# Altium PCB LP_LED_CUBE_8x8x8.PcbDoc (part 2 of 2)
Units mil, origin at the board's own origin, x right, y up, seen from the top; angles counter-clockwise.
Board outline 5225 x 2860 mil, 2 copper layers (Top Layer, Bottom Layer); 188 components, 245 nets, 933 pads, 0 vias.
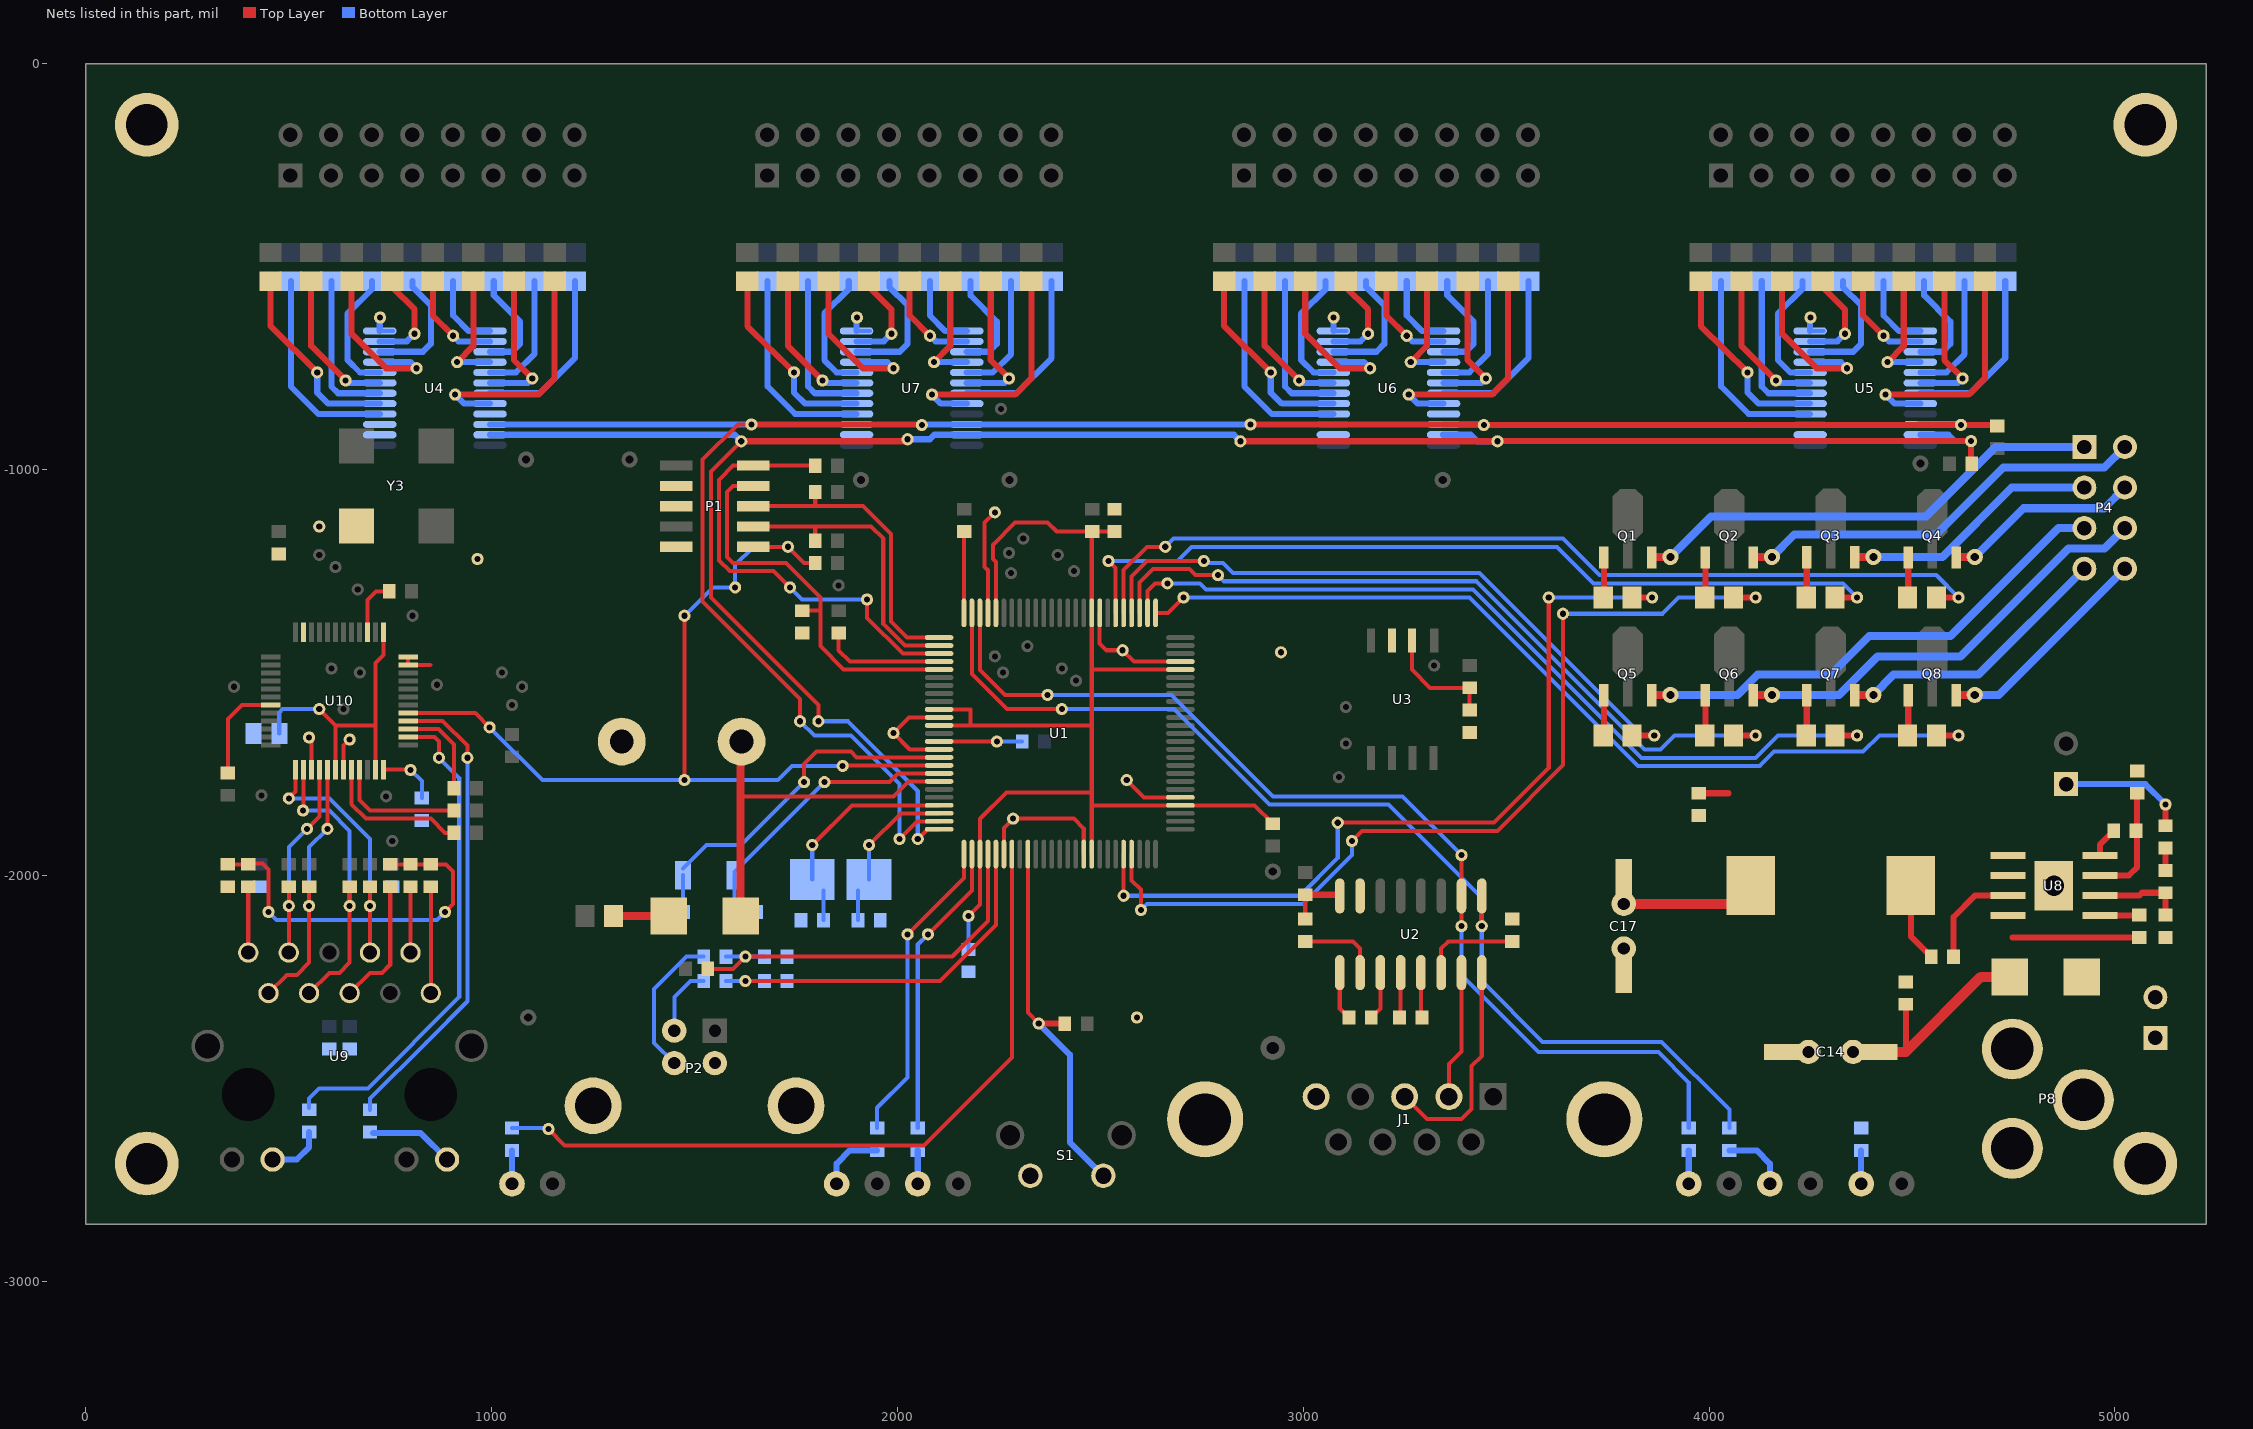
[diagram p2: the nets of this part, all layers, seen from the top]

## Nets (pads, with @x,y where several pads share a name; then routed paths per layer and width w, separated by ;. In a path a pad name is that pad's centre, name@x,y a point inside that pad or via, vN(x,y) a via of type N, cw(c..) or ccw(c..) an arc to the next point about the centre after c; other vN are vias at no path point) (continued)
GND: BT1.2 C4.1 C5.1 C6.1 C7.1 C8.1 C9.2 C10.1 C11.1 C12.2 C13.2 C14.2 C15.2 C17.2 C18.2 C19.2 C20.1 C21.1 C22.1 C23.1 C24.1 C25.2 C26.2 J1.5 J1.10 J1.11 P1.3 P1.5 P1.9 P2.4 P2.5 P8.2 P8.3 pad. pad.0@575,-1140 pad.1@965,-1220 pad.2@550,-1660 pad.3@2285,-1860 pad.4@2590,-2350 pad.5@2945,-1450 pad.6@2565,-1765 pad.7@1990,-1649.08 pad.8@725,-625 pad.8@1900,-625 pad.8@3075,-625 pad.8@4250,-625 pad.10@2240,-1105 pad.16@4850,-2025 pad.30 pad.41@2555,-1445 R7.2 R96.1 R98.1 R115.2 S1.1 U1.11 U1.15 U1.31 U1.41 U1.55 U1.72 U1.83 U1.97 U2.15 U3.7 U4.2 U4.3 U4.12 U4.21 U5.2 U5.12 U6.2 U6.12 U6.21 U7.2 U7.3 U7.12 U8.5 U10.15 U10.19 U10.35 U10.36 U10.47 Y3.2 | length 1807.2
  Top Layer w10: pad.2@550,-1660 556.1,-1666.1 U10.15@556.1,-1739.29 ; U10.19@634.84,-1739.29 634.84,-1680.16 pad.30@650,-1665 ; U10.35@794.29,-1481.42 U10.36@794.29,-1461.73 ; U10.35@794.28,-1481.32 848.58,-1481.42 ; U1.15@2102.76,-1689.37 2030.29,-1689.37 pad.7@1990,-1649.08 2028.45,-1610.63 U1.11@2102.76,-1610.63 ; U1.97@2222.83,-1352.76 2222.83,-1247.83 2215,-1240 2215,-1130 pad.10@2240,-1105 ; U1.31@2262.2,-1947.24 2262.2,-1882.8 pad.3@2285,-1860 2435,-1860 2459.06,-1884.06 U1.41@2459.06,-1947.24 ; U1.83@2498.43,-1352.76 2498.43,-1428.43 2515,-1445 pad.41@2555,-1445 2582.83,-1472.83 U1.72@2697.24,-1472.83 ; pad.6@2565,-1765 2607.48,-1807.48 U1.55@2697.24,-1807.48
  Bottom Layer w10: U4.12@724.17,-658.27 U4.12@756.73,-658.27 ; pad.8@724.17,-625.83 pad.8@725,-625 ; U7.12@1899.17,-658.27 U7.12@1931.73,-658.27 ; pad.8@1899.17,-625.83 pad.8@1900,-625 ; U6.12@3074.17,-658.27 U6.12@3106.73,-658.27 ; pad.8@3074.17,-625.83 pad.8@3075,-625 ; U5.12@4249.17,-658.27 U5.12@4281.73,-658.27 ; pad.8@4249.17,-625.83 pad.8@4250,-625
  Bottom Layer w15: U4.12@724.17,-658.27 pad.8@724.17,-625.83 ; U7.12@1899.17,-658.27 pad.8@1899.17,-625.83 ; U6.12@3074.17,-658.27 pad.8@3074.17,-625.83 ; U5.12@4249.17,-658.27 pad.8@4249.17,-625.83
LED1: pad.29@2075,-2145 R13.1 U1.27 | length 730.5
  Top Layer w10: pad.29@2075,-2145 2183.46,-2036.54 U1.27@2183.46,-1947.24
  Bottom Layer w10: R13.1@2050,-2622.44 2050,-2170 pad.29@2075,-2145
LED2: pad.28@2025,-2145 R14.1 U1.26 | length 763.7
  Top Layer w10: pad.28@2025,-2145 2163.78,-2006.22 U1.26@2163.78,-1947.24
  Bottom Layer w10: R14.1@1950,-2622.44 1950,-2572.44 2025,-2497.44 pad.28@2025,-2145
LED_ACT: pad.25@870,-1710 R105.2 U10.26 | length 1227.1
  Top Layer w10: U10.26@794.29,-1658.58 858.58,-1658.58 870,-1670 pad.25@870,-1710
  Bottom Layer w10: R105.2@550,-2572.44 550,-2550 575,-2525 695,-2525 920,-2300 920,-1760 pad.25@870,-1710
LED_LINK: pad.26 R106.2 U10.28 | length 1167.7
  Top Layer w10: U10.28@794.29,-1619.21 879.21,-1619.21 940,-1680 pad.26@940,-1710
  Bottom Layer w10: R106.2@700,-2577.44 700,-2550 840,-2410 940,-2310 pad.26@940,-1710
"M232 +V": C2.1 U2.2 | length 201.7
  Top Layer w10: C2.1@3005,-2162.56 3122.56,-2162.56 3140,-2180 U2.2@3140,-2239.49
"M232 RX2": J1.3 U2.8 | length 544
  Top Layer w10: J1.3@3250,-2545.08 3304.92,-2600 3390,-2600 3415,-2575 3415,-2470 3440,-2445 U2.8@3440,-2239.49
"M232 TX2": J1.2 U2.7 | length 318.4
  Top Layer w10: J1.2@3359.06,-2545.08 3359.06,-2465 3390,-2434.06 U2.7@3390,-2239.49
NetBT1_1: BT1.1 D6.2 U1.19 | length 934.5
  Top Layer w10: 1613.58,-1805 1990,-1805 2026.89,-1768.11 U1.19@2102.76,-1768.11
  Top Layer w20: D6.2@1613.58,-2100 1613.58,-1805 BT1.1@1613.58,-1670
NetC1_1: C1.1 U2.3 | length 119.8
  Top Layer w10: C1.1@3167.56,-2350 3190,-2327.56 U2.3@3190,-2239.49
NetC1_2: C1.2 U2.1 | length 119.8
  Top Layer w10: U2.1@3090,-2239.49 3090,-2327.56 C1.2@3112.44,-2350
NetC2_2: C2.2 L1.1 U2.16 | length 141.9
  Top Layer w10: C2.2@3005,-2107.44 L1.1@3005,-2047.56
  Top Layer w15: L1.1@3005,-2047.56 U2.16@3087.05,-2047.56
NetC3_1: C3.1 U2.5 | length 108
  Top Layer w10: C3.1@3290,-2347.44 U2.5@3290,-2239.49
NetC3_2: C3.2 U2.4 | length 108
  Top Layer w10: C3.2@3240,-2347.44 U2.4@3240,-2239.49
NetC4_2: C4.2 U2.6 | length 241.7
  Top Layer w10: U2.6@3340,-2239.49 3340,-2180 3357.44,-2162.56 C4.2@3515,-2162.56
NetC5_2: C5.2 pad.88 U1.16 Y1.1 | length 871.4
  Top Layer w10: pad.88@1770,-1770 1770,-1725 1800,-1695 1885,-1695 1899.06,-1709.06 U1.16@2102.76,-1709.06
  Bottom Layer w10: Y1.1@1471.46,-1982.44 1529.45,-1924.45 ; C5.2@1472.01,-2089.45 Y1.1@1472.01,-1999.21 ; 1530.55,-1924.45 1614.45,-1924.45 pad.88@1769.45,-1769.45
NetC6_2: C6.2 pad.89 U1.18 Y1.2 | length 695.9
  Top Layer w10: pad.89@1820,-1770 1980,-1770 2001.57,-1748.43 U1.18@2102.76,-1748.43
  Bottom Layer w10: C6.2@1597.99,-2089.45 Y1.2@1597.99,-1999.21 ; Y1.2@1598.54,-1991.46 pad.89@1820.55,-1769.45
NetC7_2: C7.2 pad.84@1790,-1925 U1.22 Y2.1 | length 510.7
  Top Layer w10: pad.84@1790,-1925 1887.83,-1827.17 U1.22@2102.76,-1827.17
  Bottom Layer w10: Y2.1@1790,-2010 pad.84@1790,-1925 ; C7.2@1817.56,-2110 Y2.1@1817.56,-2037.56
NetC8_2: C8.2 pad.84@1930,-1925 U1.23 Y2.2 | length 362.6
  Top Layer w10: pad.84@1930,-1925 2008.15,-1846.85 U1.23@2102.76,-1846.85
  Bottom Layer w10: C8.2@1902.44,-2110 Y2.2@1902.44,-2037.56 ; Y2.2@1930,-2010 pad.84@1930,-1925
NetC9_1: C9.1 C10.2 L2.2 L3.2 pad.73 U1.10 U1.12 U1.28 U1.42 U1.54 U1.71 U1.84 U1.96 | length 3108.7
  Top Layer w10: U1.12@2102.76,-1630.32 2180,-1630.32 ; U1.10@2102.76,-1590.94 2180,-1590.94 2180,-1630.32 ; pad.73@2175,-2100 2203.15,-2071.85 U1.28@2203.15,-1947.24 2203.15,-1860.22 2268.37,-1795 2478.74,-1795 ; U1.96@2242.52,-1352.76 2242.52,-1227.52 2235,-1220 2235,-1185 2290,-1130 2370,-1130 2392.56,-1152.56 L3.2@2480,-1152.56 C10.2@2535,-1152.56 ; 2478.43,-1630.32 2180,-1630.32 ; U1.42@2478.74,-1947.24 2478.74,-1492.52 ; 2478.74,-1827.17 U1.54@2697.24,-1827.17 2879.72,-1827.17 L2.2@2925,-1872.44 ; L3.2@2478.74,-1153.82 U1.84@2478.74,-1352.76 2478.74,-1492.52 ; U1.71@2697.24,-1492.52 2478.74,-1492.52
  Bottom Layer w10: C9.1@2175,-2182.44 pad.73@2175,-2100
NetC11_2: C11.2 L4.1 U3.6 | length 287.2
  Top Layer w10: U3.6@3267.64,-1421.3 3267.64,-1492.64 3312.56,-1537.56 L4.1@3410,-1537.56 C11.2@3410,-1592.44
NetC16_1: C16.1 U8.7 | length 253.7
  Top Layer w15: C16.1@4602.56,-2200 4602.56,-2102.44 4655.39,-2049.61 U8.7@4736.81,-2049.61
NetC16_2: C16.2 L5.1 U8.6 | length 195.7
  Top Layer w15: L5.1@4497.5,-2025 4497.5,-2150.06 C16.2@4547.44,-2200
NetC19_1: C19.1 R97.2 U8.3 | length 282.1
  Top Layer w15: U8.3@4963.58,-2000 5035,-2000 5055,-1980 C19.1@5055,-1797.56
NetC25_1: C25.1 pad.27@885,-2090 pad.28@450,-2090 R99.2 R104.2 R107.1 R108.1 | length 934.4
  Top Layer w10: C25.1@350,-1972.44 R108.1@400,-1972.44 402.44,-1970 435,-1970 450,-1985 pad.28@450,-2090 ; R104.2@750,-1972.44 R99.2@800,-1972.44 R107.1@850,-1972.44 887.44,-1972.44 905,-1990 905,-2070 pad.27@885,-2090
  Bottom Layer w10: pad.28@450,-2090 470,-2110 865,-2110 pad.27@885,-2090
NetD1_2: D1.2 R12.2 | length 82.4
  Bottom Layer w15: D1.2@1050,-2760 R12.2@1050,-2677.56
NetD2_2: D2.2 R13.2 | length 82.4
  Bottom Layer w15: D2.2@2050,-2760 R13.2@2050,-2677.56
NetD3_2: D3.2 R14.2 | length 163.4
  Bottom Layer w15: D3.2@1850,-2760 1850,-2710 1882.44,-2677.56 R14.2@1950,-2677.56
NetD4_2: D4.2 R15.2 | length 82.4
  Bottom Layer w15: D4.2@3950,-2760 R15.2@3950,-2677.56
NetD5_2: D5.2 R16.2 | length 163.4
  Bottom Layer w15: R16.2@4050,-2677.56 4117.56,-2677.56 4150,-2710 D5.2@4150,-2760
NetD6_1: D6.1 R17.1 | length 136
  Top Layer w20: R17.1@1300.43,-2100 D6.1@1436.42,-2100
NetD7_1: D7.1 W1.2
NetD8_2: D8.2 R98.2 | length 82.4
  Bottom Layer w15: D8.2@4375,-2760 R98.2@4375,-2677.56
NetP2_2: P2.2 R20.2 | length 171.5
  Bottom Layer w10: P2.2@1450,-2382.5 1450,-2300 1490,-2260 R20.2@1522.44,-2260
NetP2_3: P2.3 R19.2 | length 358.8
  Bottom Layer w10: P2.3@1450,-2462.5 1400,-2412.5 1400,-2280 1480,-2200 R19.2@1522.44,-2200
NetP8_1: P8.1 W1.1
NetQ1_2: Q1.2 R21.1 | length 97.3
  Top Layer w15: R21.1@3740.94,-1313.62 Q1.2@3740.94,-1216.3
NetQ2_2: Q2.2 R29.1 | length 97.3
  Top Layer w15: R29.1@3990.94,-1313.62 Q2.2@3990.94,-1216.3
NetQ3_2: Q3.2 R39.1 | length 97.3
  Top Layer w15: R39.1@4240.94,-1313.19 Q3.2@4240.94,-1215.87
NetQ4_2: Q4.2 R40.1 | length 97.3
  Top Layer w15: R40.1@4490.94,-1313.62 Q4.2@4490.94,-1216.3
NetQ5_2: Q5.2 R41.1 | length 97.3
  Top Layer w15: R41.1@3740.94,-1653.62 Q5.2@3740.94,-1556.3
NetQ6_2: Q6.2 R42.1 | length 97.3
  Top Layer w15: R42.1@3990.94,-1653.62 Q6.2@3990.94,-1556.3
NetQ7_2: Q7.2 R43.1 | length 97.3
  Top Layer w15: R43.1@4240.94,-1653.62 Q7.2@4240.94,-1556.3
NetQ8_2: Q8.2 R47.1 | length 97.3
  Top Layer w15: R47.1@4490.94,-1653.62 Q8.2@4490.94,-1556.3
NetR11_2: pad.70 R11.2 S1.2 U1.34 | length 934.2
  Top Layer w10: U1.34@2321.26,-1947.24 2321.26,-2338.13 pad.70@2348.13,-2365
  Top Layer w15: pad.70@2348.13,-2365 R11.2@2412.44,-2365
  Bottom Layer w15: pad.70@2348.13,-2365 2425,-2441.87 2425,-2657.5 S1.2@2507.5,-2740
NetR22_2: R22.2 U4.4 | length 506.8
  Bottom Layer w15: R22.2@505,-535.43 505,-795 572.8,-862.8 U4.4@724.17,-862.8
NetR23_2: pad.5@570,-760 R23.2 U4.5 | length 488
  Top Layer w15: R23.2@455,-535.43 455,-646.35 pad.5@570,-760
  Bottom Layer w15: pad.5@570,-760 570,-810 597.2,-837.2 U4.5@724.17,-837.2
NetR24_1: pad.12@910,-815 R24.1 U4.20 | length 596.2
  Top Layer w15: pad.12@910,-815 1115,-815 1155,-775 R24.1@1155,-535.43
  Bottom Layer w15: pad.12@910,-815 932.2,-837.2 U4.20@995.83,-837.2
NetR25_2: R25.2 U4.6 | length 385.6
  Bottom Layer w15: R25.2@605,-535.43 605,-795 621.61,-811.61 U4.6@724.17,-811.61
NetR26_1: R26.1 U4.19 | length 434.6
  Bottom Layer w15: U4.19@995.83,-811.61 1118.39,-811.61 1205,-725 R26.1@1205,-535.43
NetR27_2: pad.6@640,-780 R27.2 U4.7 | length 366.4
  Top Layer w15: R27.2@555,-535.43 555,-695 pad.6@640,-780
  Bottom Layer w10: pad.6@640,-780 pad.6@646.02,-786.02
  Bottom Layer w15: pad.6@646.02,-786.02 U4.7@724.17,-786.02
NetR28_1: pad.11@1100,-775 R28.1 U4.18 | length 366.9
  Top Layer w15: R28.1@1055,-535.43 1055,-730 pad.11@1100,-775
  Bottom Layer w15: U4.18@995.83,-786.02 1088.98,-786.02 pad.11@1100,-775
NetR30_2: R30.2 U4.8 | length 311.2
  Bottom Layer w15: R30.2@705,-535.43 705,-555 645,-615 645,-730 675.43,-760.43 U4.8@724.17,-760.43
NetR31_1: R31.1 U4.17 | length 307.6
  Bottom Layer w15: U4.17@995.83,-760.43 1059.57,-760.43 1105,-715 R31.1@1105,-535.43
NetR32_2: pad.7@815,-750 R32.2 U4.9 | length 421.8
  Top Layer w15: R32.2@655,-535.43 655,-665 740,-750 pad.7@815,-750
  Bottom Layer w15: U4.9@724.17,-735.04 800.04,-735.04 pad.7@815,-750
NetR33_1: pad.13@915,-735 R33.1 U4.16 | length 297
  Top Layer w15: pad.13@915,-735 955,-695 R33.1@955,-535.43
  Bottom Layer w10: pad.13@915,-735 pad.13@915,-735
  Bottom Layer w15: pad.13@915,-735 U4.16@995.83,-735.04
NetR34_2: R34.2 U4.10 | length 307.5
  Bottom Layer w15: U4.10@724.17,-709.45 830.55,-709.45 850,-690 850,-595 805,-550 R34.2@805,-535
NetR35_1: R35.1 U4.15 | length 263.7
  Bottom Layer w15: U4.15@995.83,-709.45 1050.55,-709.45 1070,-690 1070,-635 1005,-570 R35.1@1005,-535.43
NetR36_2: pad.9@810,-665 R36.2 U4.11 | length 246
  Top Layer w10: R36.2@755,-550 R36.2@755,-535.43
  Top Layer w15: R36.2@755,-550 810,-605 pad.9@810,-665
  Bottom Layer w15: U4.11@724.17,-683.86 791.14,-683.86 pad.9@810,-665
NetR37_1: pad.10@905,-670 R37.1 U4.14 | length 251.8
  Top Layer w15: R37.1@855,-535.43 855,-620 pad.10@905,-670
  Bottom Layer w15: pad.10@905,-670 918.86,-683.86 U4.14@995.83,-683.86
NetR38_1: R38.1 U4.13 | length 191.2
  Bottom Layer w15: R38.1@905,-535.43 905,-620 943.27,-658.27 U4.13@995.83,-658.27
NetR44_2: R44.2 U5.4 | length 506.8
  Bottom Layer w15: R44.2@4030,-535.43 4030,-795 4097.8,-862.8 U5.4@4249.17,-862.8
NetR45_2: pad.5@4095,-760 R45.2 U5.5 | length 488
  Top Layer w15: R45.2@3980,-535.43 3980,-646.35 pad.5@4095,-760
  Bottom Layer w15: pad.5@4095,-760 4095,-810 4122.2,-837.2 U5.5@4249.17,-837.2
NetR46_1: pad.12@4435,-815 R46.1 U5.20 | length 596.2
  Top Layer w15: pad.12@4435,-815 4640,-815 4680,-775 R46.1@4680,-535.43
  Bottom Layer w15: pad.12@4435,-815 4457.2,-837.2 U5.20@4520.83,-837.2
NetR48_2: R48.2 U5.6 | length 385.6
  Bottom Layer w15: R48.2@4130,-535.43 4130,-795 4146.61,-811.61 U5.6@4249.17,-811.61
NetR49_1: R49.1 U5.19 | length 434.6
  Bottom Layer w15: U5.19@4520.83,-811.61 4643.39,-811.61 4730,-725 R49.1@4730,-535.43
NetR50_2: pad.6@4165,-780 R50.2 U5.7 | length 366.4
  Top Layer w15: R50.2@4080,-535.43 4080,-695 pad.6@4165,-780
  Bottom Layer w10: pad.6@4165,-780 pad.6@4171.02,-786.02
  Bottom Layer w15: pad.6@4171.02,-786.02 U5.7@4249.17,-786.02
NetR51_1: pad.11@4625,-775 R51.1 U5.18 | length 366.9
  Top Layer w15: R51.1@4580,-535.43 4580,-730 pad.11@4625,-775
  Bottom Layer w15: U5.18@4520.83,-786.02 4613.98,-786.02 pad.11@4625,-775
NetR52_2: R52.2 U6.4 | length 506.8
  Bottom Layer w15: R52.2@2855,-535.43 2855,-795 2922.8,-862.8 U6.4@3074.17,-862.8
NetR53_2: R53.2 U5.8 | length 311.2
  Bottom Layer w15: R53.2@4230,-535.43 4230,-555 4170,-615 4170,-730 4200.43,-760.43 U5.8@4249.17,-760.43
NetR54_1: R54.1 U5.17 | length 307.6
  Bottom Layer w15: U5.17@4520.83,-760.43 4584.57,-760.43 4630,-715 R54.1@4630,-535.43
NetR55_2: pad.5@2920,-760 R55.2 U6.5 | length 488
  Top Layer w15: R55.2@2805,-535.43 2805,-646.35 pad.5@2920,-760
  Bottom Layer w15: pad.5@2920,-760 2920,-810 2947.2,-837.2 U6.5@3074.17,-837.2
NetR56_1: pad.12@3260,-815 R56.1 U6.20 | length 596.2
  Top Layer w15: pad.12@3260,-815 3465,-815 3505,-775 R56.1@3505,-535.43
  Bottom Layer w15: pad.12@3260,-815 3282.2,-837.2 U6.20@3345.83,-837.2
NetR57_2: pad.7@4340,-750 R57.2 U5.9 | length 421.8
  Top Layer w15: R57.2@4180,-535.43 4180,-665 4265,-750 pad.7@4340,-750
  Bottom Layer w15: U5.9@4249.17,-735.04 4325.04,-735.04 pad.7@4340,-750
NetR58_1: pad.13@4440,-735 R58.1 U5.16 | length 297
  Top Layer w15: pad.13@4440,-735 4480,-695 R58.1@4480,-535.43
  Bottom Layer w10: pad.13@4440,-735 pad.13@4440,-735
  Bottom Layer w15: pad.13@4440,-735 U5.16@4520.83,-735.04
NetR59_2: R59.2 U6.6 | length 385.6
  Bottom Layer w15: R59.2@2955,-535.43 2955,-795 2971.61,-811.61 U6.6@3074.17,-811.61
NetR60_1: R60.1 U6.19 | length 434.6
  Bottom Layer w15: U6.19@3345.83,-811.61 3468.39,-811.61 3555,-725 R60.1@3555,-535.43
NetR61_2: R61.2 U5.10 | length 307.5
  Bottom Layer w15: U5.10@4249.17,-709.45 4355.55,-709.45 4375,-690 4375,-595 4330,-550 R61.2@4330,-535
NetR62_1: R62.1 U5.15 | length 263.7
  Bottom Layer w15: U5.15@4520.83,-709.45 4575.55,-709.45 4595,-690 4595,-635 4530,-570 R62.1@4530,-535.43
NetR63_2: pad.6@2990,-780 R63.2 U6.7 | length 366.4
  Top Layer w15: R63.2@2905,-535.43 2905,-695 pad.6@2990,-780
  Bottom Layer w10: pad.6@2990,-780 pad.6@2996.02,-786.02
  Bottom Layer w15: pad.6@2996.02,-786.02 U6.7@3074.17,-786.02
NetR64_1: pad.11@3450,-775 R64.1 U6.18 | length 366.9
  Top Layer w15: R64.1@3405,-535.43 3405,-730 pad.11@3450,-775
  Bottom Layer w15: U6.18@3345.83,-786.02 3438.98,-786.02 pad.11@3450,-775
NetR65_2: pad.9@4335,-665 R65.2 U5.11 | length 246
  Top Layer w10: R65.2@4280,-550 R65.2@4280,-535.43
  Top Layer w15: R65.2@4280,-550 4335,-605 pad.9@4335,-665
  Bottom Layer w15: U5.11@4249.17,-683.86 4316.14,-683.86 pad.9@4335,-665
NetR66_1: pad.10@4430,-670 R66.1 U5.14 | length 251.8
  Top Layer w15: R66.1@4380,-535.43 4380,-620 pad.10@4430,-670
  Bottom Layer w15: pad.10@4430,-670 4443.86,-683.86 U5.14@4520.83,-683.86
NetR67_2: R67.2 U6.8 | length 311.2
  Bottom Layer w15: R67.2@3055,-535.43 3055,-555 2995,-615 2995,-730 3025.43,-760.43 U6.8@3074.17,-760.43
NetR68_1: R68.1 U6.17 | length 307.6
  Bottom Layer w15: U6.17@3345.83,-760.43 3409.57,-760.43 3455,-715 R68.1@3455,-535.43
NetR69_1: R69.1 U5.13 | length 191.2
  Bottom Layer w15: R69.1@4430,-535.43 4430,-620 4468.27,-658.27 U5.13@4520.83,-658.27
NetR70_2: R70.2 U7.4 | length 506.8
  Bottom Layer w15: R70.2@1680,-535.43 1680,-795 1747.8,-862.8 U7.4@1899.17,-862.8
NetR71_2: pad.7@3165,-750 R71.2 U6.9 | length 421.8
  Top Layer w15: R71.2@3005,-535.43 3005,-665 3090,-750 pad.7@3165,-750
  Bottom Layer w15: U6.9@3074.17,-735.04 3150.04,-735.04 pad.7@3165,-750
NetR72_1: pad.13@3265,-735 R72.1 U6.16 | length 297
  Top Layer w15: pad.13@3265,-735 3305,-695 R72.1@3305,-535.43
  Bottom Layer w10: pad.13@3265,-735 pad.13@3265,-735
  Bottom Layer w15: pad.13@3265,-735 U6.16@3345.83,-735.04
NetR73_2: pad.5@1745,-760 R73.2 U7.5 | length 488
  Top Layer w15: R73.2@1630,-535.43 1630,-646.35 pad.5@1745,-760
  Bottom Layer w15: pad.5@1745,-760 1745,-810 1772.2,-837.2 U7.5@1899.17,-837.2
NetR74_1: pad.12@2085,-815 R74.1 U7.20 | length 596.2
  Top Layer w15: pad.12@2085,-815 2290,-815 2330,-775 R74.1@2330,-535.43
  Bottom Layer w15: pad.12@2085,-815 2107.2,-837.2 U7.20@2170.83,-837.2
NetR75_2: R75.2 U6.10 | length 307.5
  Bottom Layer w15: U6.10@3074.17,-709.45 3180.55,-709.45 3200,-690 3200,-595 3155,-550 R75.2@3155,-535
NetR76_1: R76.1 U6.15 | length 263.7
  Bottom Layer w15: U6.15@3345.83,-709.45 3400.55,-709.45 3420,-690 3420,-635 3355,-570 R76.1@3355,-535.43
NetR77_2: R77.2 U7.6 | length 385.6
  Bottom Layer w15: R77.2@1780,-535.43 1780,-795 1796.61,-811.61 U7.6@1899.17,-811.61
NetR78_1: R78.1 U7.19 | length 434.6
  Bottom Layer w15: U7.19@2170.83,-811.61 2293.39,-811.61 2380,-725 R78.1@2380,-535.43
NetR79_2: pad.9@3160,-665 R79.2 U6.11 | length 246
  Top Layer w10: R79.2@3105,-550 R79.2@3105,-535.43
  Top Layer w15: R79.2@3105,-550 3160,-605 pad.9@3160,-665
  Bottom Layer w15: U6.11@3074.17,-683.86 3141.14,-683.86 pad.9@3160,-665
NetR80_1: pad.10@3255,-670 R80.1 U6.14 | length 251.8
  Top Layer w15: R80.1@3205,-535.43 3205,-620 pad.10@3255,-670
  Bottom Layer w15: pad.10@3255,-670 3268.86,-683.86 U6.14@3345.83,-683.86
NetR81_2: pad.6@1815,-780 R81.2 U7.7 | length 366.4
  Top Layer w15: R81.2@1730,-535.43 1730,-695 pad.6@1815,-780
  Bottom Layer w10: pad.6@1815,-780 pad.6@1821.02,-786.02
  Bottom Layer w15: pad.6@1821.02,-786.02 U7.7@1899.17,-786.02
NetR82_1: pad.11@2275,-775 R82.1 U7.18 | length 366.9
  Top Layer w15: R82.1@2230,-535.43 2230,-730 pad.11@2275,-775
  Bottom Layer w15: U7.18@2170.83,-786.02 2263.98,-786.02 pad.11@2275,-775
NetR83_1: R83.1 U6.13 | length 191.2
  Bottom Layer w15: R83.1@3255,-535.43 3255,-620 3293.27,-658.27 U6.13@3345.83,-658.27
NetR84_2: R84.2 U7.8 | length 311.2
  Bottom Layer w15: R84.2@1880,-535.43 1880,-555 1820,-615 1820,-730 1850.43,-760.43 U7.8@1899.17,-760.43
NetR85_1: R85.1 U7.17 | length 307.6
  Bottom Layer w15: U7.17@2170.83,-760.43 2234.57,-760.43 2280,-715 R85.1@2280,-535.43
NetR86_2: pad.7@1990,-750 R86.2 U7.9 | length 421.8
  Top Layer w15: R86.2@1830,-535.43 1830,-665 1915,-750 pad.7@1990,-750
  Bottom Layer w15: U7.9@1899.17,-735.04 1975.04,-735.04 pad.7@1990,-750
NetR87_1: pad.13@2090,-735 R87.1 U7.16 | length 297
  Top Layer w15: pad.13@2090,-735 2130,-695 R87.1@2130,-535.43
  Bottom Layer w10: pad.13@2090,-735 pad.13@2090,-735
  Bottom Layer w15: pad.13@2090,-735 U7.16@2170.83,-735.04
NetR88_2: R88.2 U7.10 | length 307.5
  Bottom Layer w15: U7.10@1899.17,-709.45 2005.55,-709.45 2025,-690 2025,-595 1980,-550 R88.2@1980,-535
NetR89_1: R89.1 U7.15 | length 263.7
  Bottom Layer w15: U7.15@2170.83,-709.45 2225.55,-709.45 2245,-690 2245,-635 2180,-570 R89.1@2180,-535.43
NetR90_2: pad.9@1985,-665 R90.2 U7.11 | length 246
  Top Layer w10: R90.2@1930,-550 R90.2@1930,-535.43
  Top Layer w15: R90.2@1930,-550 1985,-605 pad.9@1985,-665
  Bottom Layer w15: U7.11@1899.17,-683.86 1966.14,-683.86 pad.9@1985,-665
NetR91_1: pad.10@2080,-670 R91.1 U7.14 | length 251.8
  Top Layer w15: R91.1@2030,-535.43 2030,-620 pad.10@2080,-670
  Bottom Layer w15: pad.10@2080,-670 2093.86,-683.86 U7.14@2170.83,-683.86
NetR92_1: R92.1 U7.13 | length 191.2
  Bottom Layer w15: R92.1@2080,-535.43 2080,-620 2118.27,-658.27 U7.13@2170.83,-658.27
NetR93_1: R93.1 U8.1 | length 95.4
  Top Layer w15: U8.1@4963.19,-2098.82 R93.1@5058.62,-2098.82
NetR94_1: R94.1 R95.2 | length 54.9
  Top Layer w15: R95.2@5125,-1987.44 R94.1@5125,-1932.56
NetR95_1: R95.1 R96.2 U8.2 | length 219.6
  Top Layer w15: U8.2@4963.19,-2049.61 5060,-2049.61 5067.05,-2042.56 R95.1@5125,-2042.56 R96.2@5125,-2097.44
NetR97_1: R97.1 U8.4 | length 75.4
  Top Layer w15: U8.4@4963.19,-1951.18 4963.19,-1924.25 R97.1@4997.44,-1890
NetR99_1: R99.1 U9.8 | length 162.4
  Top Layer w10: U9.8@800,-2190 R99.1@800,-2027.56
NetR104_1: R104.1 U9.5 | length 321.4
  Top Layer w10: U9.5@650,-2290 700,-2240 730,-2240 750,-2220 R104.1@750,-2027.56
NetR105_1: R105.1 U9.12 | length 139.9
  Bottom Layer w15: U9.12@460,-2700 520,-2700 550,-2670 R105.1@550,-2632.56
NetR106_1: R106.1 U9.14 | length 209.5
  Bottom Layer w15: R106.1@707.44,-2635 825,-2635 U9.14@890,-2700
NetR107_2: R107.2 U9.10 | length 262.4
  Top Layer w10: U9.10@850,-2290 R107.2@850,-2027.56
NetR108_2: R108.2 U9.9 | length 162.4
  Top Layer w10: U9.9@400,-2190 R108.2@400,-2027.56
NetR109_1: R109.1 U10.7 | length 252.7
  Top Layer w10: R109.1@350,-1747.44 350.16,-1747.28 350.16,-1614.84 385.16,-1579.84 U10.7@455.71,-1579.84
NetR110_2: R110.2 U10.39 | length 141.9
  Top Layer w10: U10.39@693.9,-1400.71 693.9,-1321.1 715,-1300 R110.2@747.44,-1300
NetR111_2: R111.2 U10.21 | length 318.8
  Top Layer w10: U10.21@674.21,-1739.29 674.21,-1814.21 700,-1840 R111.2@907.44,-1840
NetR112_1: R112.1 U10.20 | length 367.3
  Top Layer w10: U10.20@654.53,-1739.29 654.53,-1824.53 690,-1860 850,-1860 885,-1895 R112.1@907.44,-1895
NetR114_2: R114.2 U10.27 | length 236.7
  Top Layer w10: U10.27@794.29,-1638.9 868.9,-1638.9 907.44,-1677.44 R114.2@907.44,-1785
NetR115_1: pad.29@800,-1740 R115.1 U10.24 | length 146.8
  Top Layer w10: U10.24@733.27,-1739.29 pad.29@799.29,-1739.29
  Bottom Layer w10: pad.29@800,-1740 827.72,-1767.72 R115.1@827.72,-1809.25
PFB: C26.1 pad.16@575,-1590 U10.18 U10.23 U10.37 | length 775
  Top Layer w10: pad.16@575,-1590 615,-1630 713.58,-1630 ; U10.18@615.16,-1739.29 615.16,-1630.16 ; U10.23@713.58,-1739.29 713.58,-1630 ; U10.37@733.27,-1400.71 733.27,-1456.73 713.58,-1476.42 713.58,-1630
  Bottom Layer w10: C26.1@476.5,-1650 476.5,-1598.5 485,-1590 pad.16@575,-1590 pad.16@566.9,-1596.62
RESET: P1.10 pad.8@1600,-1290 pad.17@1475,-1765 pad.18@1475,-1360 pad.33 pad.91 pad.92 R1.1 U1.17 U10.29 | length 2321.9
  Top Layer w10: U10.29@794.29,-1599.53 959.53,-1599.53 pad.33@995,-1635 ; pad.17@1475,-1765 pad.18@1475,-1360 ; P1.10@1645,-1190 pad.91@1730,-1190 1770,-1230 R1.1@1797.44,-1230 ; pad.92@1866.23,-1728.74 U1.17@2102.76,-1728.74
  Bottom Layer w10: pad.33@995,-1635 1125,-1765 pad.17@1475,-1765 1705,-1765 1740.03,-1729.97 pad.92@1865,-1729.97 ; pad.18@1475,-1360 1545,-1290 pad.8@1600,-1290 1600,-1235 1645,-1190 pad.91@1730,-1190
RO_1: P4.1 pad.41@3905,-1215 Q1.3 | length 1176.9
  Top Layer w20: Q1.3@3860.35,-1215 pad.41@3905,-1215
  Bottom Layer w20: pad.41@3905,-1215 4005,-1115 4535,-1115 4706,-944 P4.1@4925,-944
RO_2: P4.2 pad.42@4155,-1215 Q2.3 | length 1026.9
  Top Layer w20: Q2.3@4110.35,-1215 pad.42@4155,-1215
  Bottom Layer w20: pad.42@4155,-1215 4210,-1160 4560,-1160 4725,-995 4974,-995 P4.2@5025,-944
RO_3: P4.3 pad.43@4405,-1215 Q3.3 | length 635.5
  Top Layer w20: Q3.3@4360.35,-1215 pad.43@4405,-1215
  Bottom Layer w20: pad.43@4405,-1215 4575,-1215 4746,-1044 P4.3@4925,-1044
RO_4: P4.4 pad.44@4655,-1215 Q4.3 | length 485.5
  Top Layer w20: Q4.3@4610.35,-1215 pad.44@4655,-1215
  Bottom Layer w20: pad.44@4655,-1215 4775,-1095 4974,-1095 P4.4@5025,-1044
RO_5: P4.5 pad.46@3905,-1555 Q5.3 | length 1234.9
  Top Layer w20: Q5.3@3860.35,-1555 pad.46@3905,-1555
  Bottom Layer w20: pad.46@3905,-1555 4070,-1555 4120,-1505 4300,-1505 4395,-1410 4595,-1410 4861,-1144 P4.5@4925,-1144
RO_6: P4.6 pad.47@4155,-1555 Q6.3 | length 1084.9
  Top Layer w20: Q6.3@4110.35,-1555 pad.47@4155,-1555
  Bottom Layer w20: pad.47@4155,-1555 4320,-1555 4415,-1460 4620,-1460 4886,-1194 4975,-1194 P4.6@5025,-1144
RO_7: P4.7 pad.48@4405,-1555 Q7.3 | length 693.5
  Top Layer w20: Q7.3@4360.35,-1555 pad.48@4405,-1555
  Bottom Layer w20: pad.48@4405,-1555 4455,-1505 4664,-1505 P4.7@4925,-1244
RO_8: P4.8 pad.49@4655,-1555 Q8.3 | length 543.5
  Top Layer w20: Q8.3@4610.35,-1555 pad.49@4655,-1555
  Bottom Layer w20: pad.49@4655,-1555 4714,-1555 P4.8@5025,-1244
ROW1: pad.2@3605,-1315 pad.4@3085,-1870 pad.6@2557.48,-2050 pad.56@3860,-1315 R21.2 U1.46 | length 2058.6
  Top Layer w10: pad.6@2557.48,-2052.48 U1.46@2557.48,-1947.24 ; pad.4@3085,-1870 3470,-1870 3605,-1735 pad.2@3605,-1315
  Top Layer w15: R21.2@3810.43,-1315 pad.56@3860,-1315
  Bottom Layer w10: pad.6@2557.48,-2050 2991.72,-2050 3085,-1956.72 pad.4@3085,-1870 ; pad.2@3605,-1315 pad.56@3860,-1315
ROW2: pad.3@3640,-1355 pad.5@3120,-1915 pad.7@2600,-2085 pad.57@4115,-1315 R29.2 U1.47 | length 2274.9
  Top Layer w10: U1.47@2577.17,-1947.24 2577.17,-2012.17 2600,-2035 pad.7@2600,-2085 ; pad.5@3120,-1915 3145,-1890 3478.28,-1890 3640,-1728.28 pad.3@3640,-1355
  Top Layer w15: R29.2@4060.43,-1315 pad.57@4115,-1315
  Bottom Layer w10: pad.7@2600,-2085 2615,-2070 3000,-2070 3120,-1950 pad.5@3120,-1915 ; pad.3@3640,-1355 3885,-1355 3925,-1315 pad.57@4115,-1315
ROW3: pad.51@4365,-1315 pad.96 R39.2 U1.81 | length 2101
  Top Layer w10: pad.96@2520,-1225 2537.8,-1242.8 U1.81@2537.8,-1352.76
  Top Layer w15: R39.2@4310.43,-1315 pad.51@4365,-1315
  Bottom Layer w10: pad.96@2520,-1225 2690,-1225 2725,-1190 3625,-1190 3715,-1280 4330,-1280 pad.51@4365,-1315
ROW4: pad.50@4615,-1315 pad.95 R40.2 U1.80 | length 2309.5
  Top Layer w10: U1.80@2557.48,-1352.76 2557.48,-1247.52 2615,-1190 pad.95@2660,-1190
  Top Layer w15: R40.2@4560.43,-1315 pad.50@4615,-1315
  Bottom Layer w10: pad.95@2660,-1190 2680,-1170 3640,-1170 3730,-1260 4560,-1260 pad.50@4615,-1315
ROW5: pad.50@3865,-1655 pad.93 R41.2 U1.79 | length 1626.1
  Top Layer w10: U1.79@2577.17,-1352.76 2577.17,-1262.83 2615,-1225 pad.93@2755,-1225
  Top Layer w15: R41.2@3810.43,-1655 pad.50@3865,-1655
  Bottom Layer w10: pad.93@2755,-1225 2760,-1230 2802.43,-1230 2827.43,-1255 3434.85,-1255 3834.85,-1655 pad.50@3865,-1655
ROW6: pad.50@4115,-1655 pad.94 R42.2 U1.78 | length 1859.9
  Top Layer w10: U1.78@2596.85,-1352.76 2596.85,-1278.15 2630,-1245 2720,-1245 2735,-1260 pad.94@2790,-1260
  Top Layer w15: R42.2@4060.43,-1655 pad.50@4115,-1655
  Bottom Layer w10: pad.94@2790,-1260 2805,-1275 3426.57,-1275 3841.57,-1690 3880,-1690 3915,-1655 pad.50@4115,-1655
ROW7: pad.0@2665,-1280 pad.50@4365,-1655 R43.2 U1.77 | length 2065.9
  Top Layer w10: U1.77@2616.54,-1352.76 2616.54,-1298.46 2635,-1280 pad.0@2665,-1280
  Top Layer w15: R43.2@4310.43,-1655 pad.50@4365,-1655
  Bottom Layer w10: pad.0@2665,-1280 2745,-1280 2760,-1295 3418.28,-1295 3833.28,-1710 4115,-1710 4170,-1655 pad.50@4365,-1655
ROW8: pad.1@2705,-1315 pad.50@4615,-1655 R47.2 U1.76 | length 2251.9
  Top Layer w10: U1.76@2636.22,-1352.76 2667.24,-1352.76 pad.1@2705,-1315
  Top Layer w15: R47.2@4560.43,-1655 pad.50@4615,-1655
  Bottom Layer w10: pad.1@2705,-1315 3410,-1315 3825,-1730 4125,-1730 4160,-1695 4380,-1695 4420,-1655 pad.50@4615,-1655
RSTOUT: pad.86 R2.1 U1.14 | length 204.4
  Top Layer w10: U1.14@2102.76,-1669.68 pad.86@2244.68,-1669.68
  Bottom Layer w10: pad.86@2245,-1670 R2.1@2307.44,-1670
RTCK: R10.1 U1.100 | length 199
  Top Layer w10: U1.100@2163.78,-1352.76 R10.1@2163.78,-1153.78
RXD+: pad.21@650,-2075 pad.23 R103.1 U9.3 U10.14 | length 740.4
  Top Layer w10: pad.23@535.07,-1840 536.42,-1838.65 U10.14@536.42,-1739.29 ; U9.3@550,-2290 600,-2240 625,-2240 650,-2215 R103.1@650,-2027.56
  Bottom Layer w10: pad.23@535.07,-1840 600,-1840 650,-1890 pad.21@650,-2075
RXD-: pad.22 pad.24 R102.1 U9.6 U10.13 | length 646.5
  Top Layer w10: pad.24@500,-1810 516.73,-1793.27 U10.13@516.73,-1739.29 ; U9.6@700,-2190 R102.1@700,-2027.56
  Bottom Layer w10: pad.24@500,-1810 600,-1810 700,-1910 pad.22@700,-2075
SCL-0: pad.11@2005,-1910 pad.14 pad.16@1640,-888.39 pad.17@2060,-890 pad.19@2870,-888.39 pad.59@3445,-890 pad.62@4620.83,-889.57 R4.2 U1.24 U4.22 U5.22 U6.22 U7.22 | length 5372.6
  Top Layer w10: pad.16@1640,-888.39 1606.61,-888.39 1520,-975 1520,-1325 1760,-1565 pad.14@1760,-1620 ; pad.11@2005,-1910 2048.46,-1866.54 U1.24@2102.76,-1866.54
  Top Layer w15: pad.16@1640,-888.39 pad.17@2058.39,-888.39 ; pad.19@2868.75,-888.39 pad.59@3442.14,-888.39 ; pad.59@3443.75,-890 pad.62@4620.83,-889.57 R4.2@4710,-890
  Bottom Layer w10: pad.14@1760,-1620 1795,-1655 1885,-1655 2005,-1775 pad.11@2005,-1910
  Bottom Layer w15: U4.22@995.83,-888.39 pad.16@1640,-888.39 ; pad.17@2060,-888.39 U7.22@2170.83,-888.39 pad.19@2870,-888.39 ; U6.22@3345.83,-888.39 pad.59@3443.39,-888.39 ; U5.22@4516.65,-887.95 pad.62@4619.21,-887.95
SDA-0: pad.12@2050,-1910 pad.13@1805,-1620 pad.18@2025,-925 pad.20@1615,-930 pad.21@2845,-930 pad.60@3478.75,-930 pad.61@4645.83,-929.57 R3.2 U1.25 U4.23 U5.23 U6.23 U7.23 | length 5323.8
  Top Layer w10: pad.20@1615,-930 1540,-1005 1540,-1315 1805,-1580 pad.13@1805,-1620 ; pad.12@2050,-1910 2073.78,-1886.22 U1.25@2102.76,-1886.22
  Top Layer w15: pad.20@1615,-930 2020,-930 pad.18@2025,-925 ; pad.21@2843.75,-930 pad.60@3478.75,-930 pad.61@4645.83,-929.57 R3.2@4645.83,-982.13
  Bottom Layer w10: pad.13@1805,-1620 1878.28,-1620 2050,-1791.72 pad.12@2050,-1910
  Bottom Layer w15: U4.23@995.83,-913.98 1598.98,-913.98 pad.20@1615,-930 ; pad.18@2025,-925 2080,-925 2091.02,-913.98 U7.23@2170.83,-913.98 2828.98,-913.98 pad.21@2845,-930 ; U6.23@3344.58,-913.98 3412.73,-913.98 3428.75,-930 pad.60@3478.75,-930 ; U5.23@4520.83,-913.98 4590.24,-913.98 4605.83,-929.57 pad.61@4645.83,-929.57
TCK: P1.4 R7.1 U1.5 | length 984.2
  Top Layer w10: P1.4@1645,-1040 1595,-1040 1580,-1055 1580,-1215 1595,-1230 1725,-1230 1810,-1315 1810,-1435 1867.52,-1492.52 U1.5@2102.76,-1492.52 ; R7.1@1765,-1347.44 1810,-1347.44
TDI: P1.8 R5.1 U1.2 | length 734.9
  Top Layer w10: P1.8@1645,-1140 1935,-1140 1965,-1170 1965,-1380 2018.46,-1433.46 U1.2@2102.76,-1433.46 ; R5.1@1797.44,-1175 1797.44,-1142.44
TDO/SW0: P1.6 R6.1 U1.1 | length 756.7
  Top Layer w10: P1.6@1647.72,-1092.72 P1.6@1645,-1090 1915,-1090 1983.78,-1158.78 1983.78,-1373.78 2023.78,-1413.78 U1.1@2102.76,-1413.78 ; 1797.44,-1090 R6.1@1797.44,-1055
TMS: P1.2 pad.35 pad.36 R8.1 U1.3 | length 1114.6
  Top Layer w10: pad.35@1735,-1290 1695,-1250 1586.72,-1250 1560,-1223.28 1560,-1025 1595,-990 P1.2@1645,-990 R8.1@1797.44,-990 ; pad.36@1925,-1320 1925,-1365 2013.15,-1453.15 U1.3@2102.76,-1453.15
  Bottom Layer w10: pad.35@1735,-1290 1765,-1320 pad.36@1925,-1320
TRST: R9.1 U1.4 | length 301.7
  Top Layer w10: R9.1@1855,-1402.56 1855,-1445 1882.83,-1472.83 U1.4@2102.76,-1472.83
TXD+: pad.17@550,-2075 pad.19@595,-1885 R101.1 U9.1 U10.17 | length 692.4
  Top Layer w10: U9.1@470,-2290 U9.1@450,-2290 495,-2245 520,-2245 550,-2215 R101.1@550,-2027.56 ; pad.19@595.47,-1884.53 U10.17@595.47,-1739.29
  Bottom Layer w10: pad.17@550,-2075 550,-1930 pad.19@595,-1885
TXD-: pad.18@500,-2075 pad.20@545,-1885 R100.1 U9.2 U10.16 | length 529.5
  Top Layer w10: U9.2@500,-2190 pad.18@500,-2075 R100.1@500,-2027.56 ; pad.20@545,-1885 575.79,-1854.21 U10.16@575.79,-1739.29
  Bottom Layer w10: pad.18@500,-2075 500,-1930 pad.20@545,-1885
U0_RXD: pad.25@3440,-2125 pad.37 R16.1 U1.99 U2.9 | length 2702.1
  Top Layer w10: U1.99@2183.46,-1352.76 2183.46,-1503.46 2270,-1590 pad.37@2405,-1590 ; pad.25@3440,-2125 U2.9@3440,-2050.51
  Bottom Layer w10: pad.37@2405,-1590 2681.72,-1590 2916.72,-1825 3210,-1825 3440,-2055 pad.25@3440,-2125 3440,-2260 ; 3440,-2260.51 3590,-2410.51 ; 3590,-2410 3883.28,-2410 4050,-2576.72 R16.1@4050,-2622.44
U0_TXD: pad.25@3390,-2125 pad.38 pad.39 R15.1 U1.98 U2.10 | length 2593.7
  Top Layer w10: U1.98@2203.15,-1352.76 2203.15,-1493.15 2265,-1555 pad.38@2370,-1555 ; pad.25@3390,-2125 U2.10@3390,-2050.51 pad.39@3390,-1950
  Bottom Layer w10: pad.38@2370,-1555 2675,-1555 2925,-1805 3245,-1805 pad.39@3390,-1950 ; 3390,-2245.51 3580,-2435.51 ; 3390,-2245 pad.25@3390,-2125 ; 3580,-2435 3875,-2435 3950,-2510 R15.1@3950,-2622.44
"USB D+": C12.1 pad.27@1625,-2200 R18.2 R19.1 U1.29 | length 998.9
  Top Layer w10: R18.2@1532.56,-2230 1595,-2230 pad.27@1625,-2200 2135,-2200 2222.83,-2112.17 U1.29@2222.83,-1947.24
  Bottom Layer w10: R19.1@1577.56,-2200 pad.27@1625,-2200 C12.1@1672.44,-2200
"USB D-": C13.1 pad.27@1625,-2260 R20.1 U1.30 | length 944.6
  Top Layer w10: pad.27@1625,-2260 2105,-2260 2242.52,-2122.48 U1.30@2242.52,-1947.24
  Bottom Layer w10: R20.1@1577.56,-2260 pad.27@1625,-2260 C13.1@1672.44,-2260
"USB LED": pad.8@1140,-2625 R12.1 U1.32 | length 1836.6
  Top Layer w10: pad.8@1140,-2625 1180,-2665 2065,-2665 2281.89,-2448.11 U1.32@2281.89,-1947.24
  Bottom Layer w10: R12.1@1050,-2622.44 pad.8@1137.44,-2622.44
VCC: C14.1 C15.1 D7.2 R93.2 U8.8 | length 833
  Top Layer w15: 4485,-2435 C15.1@4485,-2317.56 ; 4747.44,-2152.56 R93.2@5060,-2152.56
  Top Layer w25: C14.1@4415,-2435 4485,-2435 4670,-2250 D7.2@4741.42,-2250
VOUT: C17.1 C18.1 L5.2 pad.45@5125,-1825 R94.2 W2.1 | length 685.7
  Top Layer w15: C18.1@3975,-1797.44 4047.56,-1797.44 ; R94.2@5125,-1877.44 pad.45@5125,-1825
  Top Layer w25: C17.1@3790,-2070 L5.2@4085,-2070
  Bottom Layer w15: W2.1@4880,-1775 5075,-1775 pad.45@5125,-1825
pads on no net: J1.1 J1.4 J1.6 J1.7 J1.8 J1.9 P1.7 P2.1 R2.2 S1.GND U1.6 U1.7 U1.8 U1.9 U1.13 U1.20 U1.21 U1.33 U1.35 U1.36 U1.37 U1.38 U1.39 U1.40 U1.43 U1.44 U1.45 U1.48 U1.49 U1.50 U1.51 U1.52 U1.53 U1.56 U1.57 U1.64 U1.65 U1.66 U1.67 U1.68 U1.69 U1.70 U1.73 U1.74 U1.75 U1.82 U1.85 U2.11 U2.12 U2.13 U2.14 U4.1 U5.1 U6.1 U7.1 U9. U9.GND U10.1 U10.5 U10.6 U10.8 U10.9 U10.10 U10.11 U10.12 U10.25 U10.33 U10.38 U10.42 U10.45 U10.46 Y3.1

## Polygon pours and split planes (outlines as drawn)
GND on Bottom Layer "Top Layer-No Net" (solid, remove dead copper, pour order 10): 0,-2860 0,0 5225,0 5225,-2860
GND on Top Layer "Top Layer-No Net" (solid, remove dead copper, pour order 12): 5225,-2860 5225,0 0,0 0,-2860

## Keep-outs
Keep-Out Layer:
  the board outline again, w10

## Other copper
Top Layer:
  rectangle net CPU_3V3: 3700,-1175.43 4830,-1035.43
  rectangle net CPU_3V3: 4700,-1410 4830,-1160
  rectangle net CPU_3V3: 3700,-1515 4915,-1375
  rectangle net CPU_3V3: 4700,-1710 4915,-1430
  rectangle net VOUT: 4035,-1895 4915,-1740
  rectangle net VOUT: 4035,-2105 4170,-1855
  rectangle net NetC16_2: 4505,-2025 4780,-1975
  rectangle net NetP8_1: 4750,-2450 5135,-2365
  rectangle net NetD7_1: 4870,-2335 5135,-2200
  rectangle net VCC: 4700,-2225 4775,-2095
  text "String" at 2360.63,-1947.24 h40
Bottom Layer:
  rectangle net NetP8_1: 4760,-2450 5135,-2365

## Silkscreen, mask and mechanical layers (free items; w line width, h text height)
Top Overlay:
  text "LPPROJECTS" at 80,-305 h100 r270
  text "Luka Penger" at 165,-305 h100 r270
  text "1-16" at 1305,-465 h60
  text "17-32" at 2450,-465 h60
  text "33-48" at 3620,-465 h60
  text "49-64" at 4795,-465 h60
  text "1-8" at 5150,-715 h60 r90
  text "LED CUBE 8x8x8" at 100,-1825 h100 r270
  text "LPC1769" at 2505,-2175 h60
Bottom Overlay:
  text "COLUMN 1 - 16" at 1035,-90 h60
  text "COLUMN 17 - 32" at 2210,-90 h60
  text "COLUMN 33 - 48" at 3385,-90 h60
  text "COLUMN 49 - 64" at 4560,-90 h60
  text "ROW 1 - 8" at 5110,-1220 h60 r270
  text "ETHERNET" at 770,-2835 h60
  text "USB" at 1565,-2835 h60
  text "SERIAL" at 3350,-2835 h60
  text "12V DC" at 4845,-2835 h60

## Text inside footprints (layer, text, board x,y; h text height)
BT1: Top Overlay "+" at 1637.44,-1746.77 h40 r180
C14: Top Overlay "+" at 4350,-2350 h40 r270
C17: Top Overlay "+" at 3705,-2075 h40
J1: Top Overlay "6" at 3430,-2705 h40 r180; Top Overlay "9" at 3100,-2705 h40 r180; Top Overlay "5" at 3045,-2430 h40 r180; Top Overlay "1" at 3475,-2430 h40 r180
P2: Top Overlay "1" at 1600,-2405 h40